# Altium PCB DUTBoard_Sandbox.PcbDoc (part 3 of 6)
Units mil, origin at the board's own origin, x right, y up, seen from the top; angles counter-clockwise.
Board outline 5475 x 5475 mil, 4 copper layers (Top Layer, Mid-Layer 1, Mid-Layer 2, Bottom Layer); 89 components, 507 nets, 1705 pads, 1204 vias.
Unrouted connection lines stored in the file: 6.
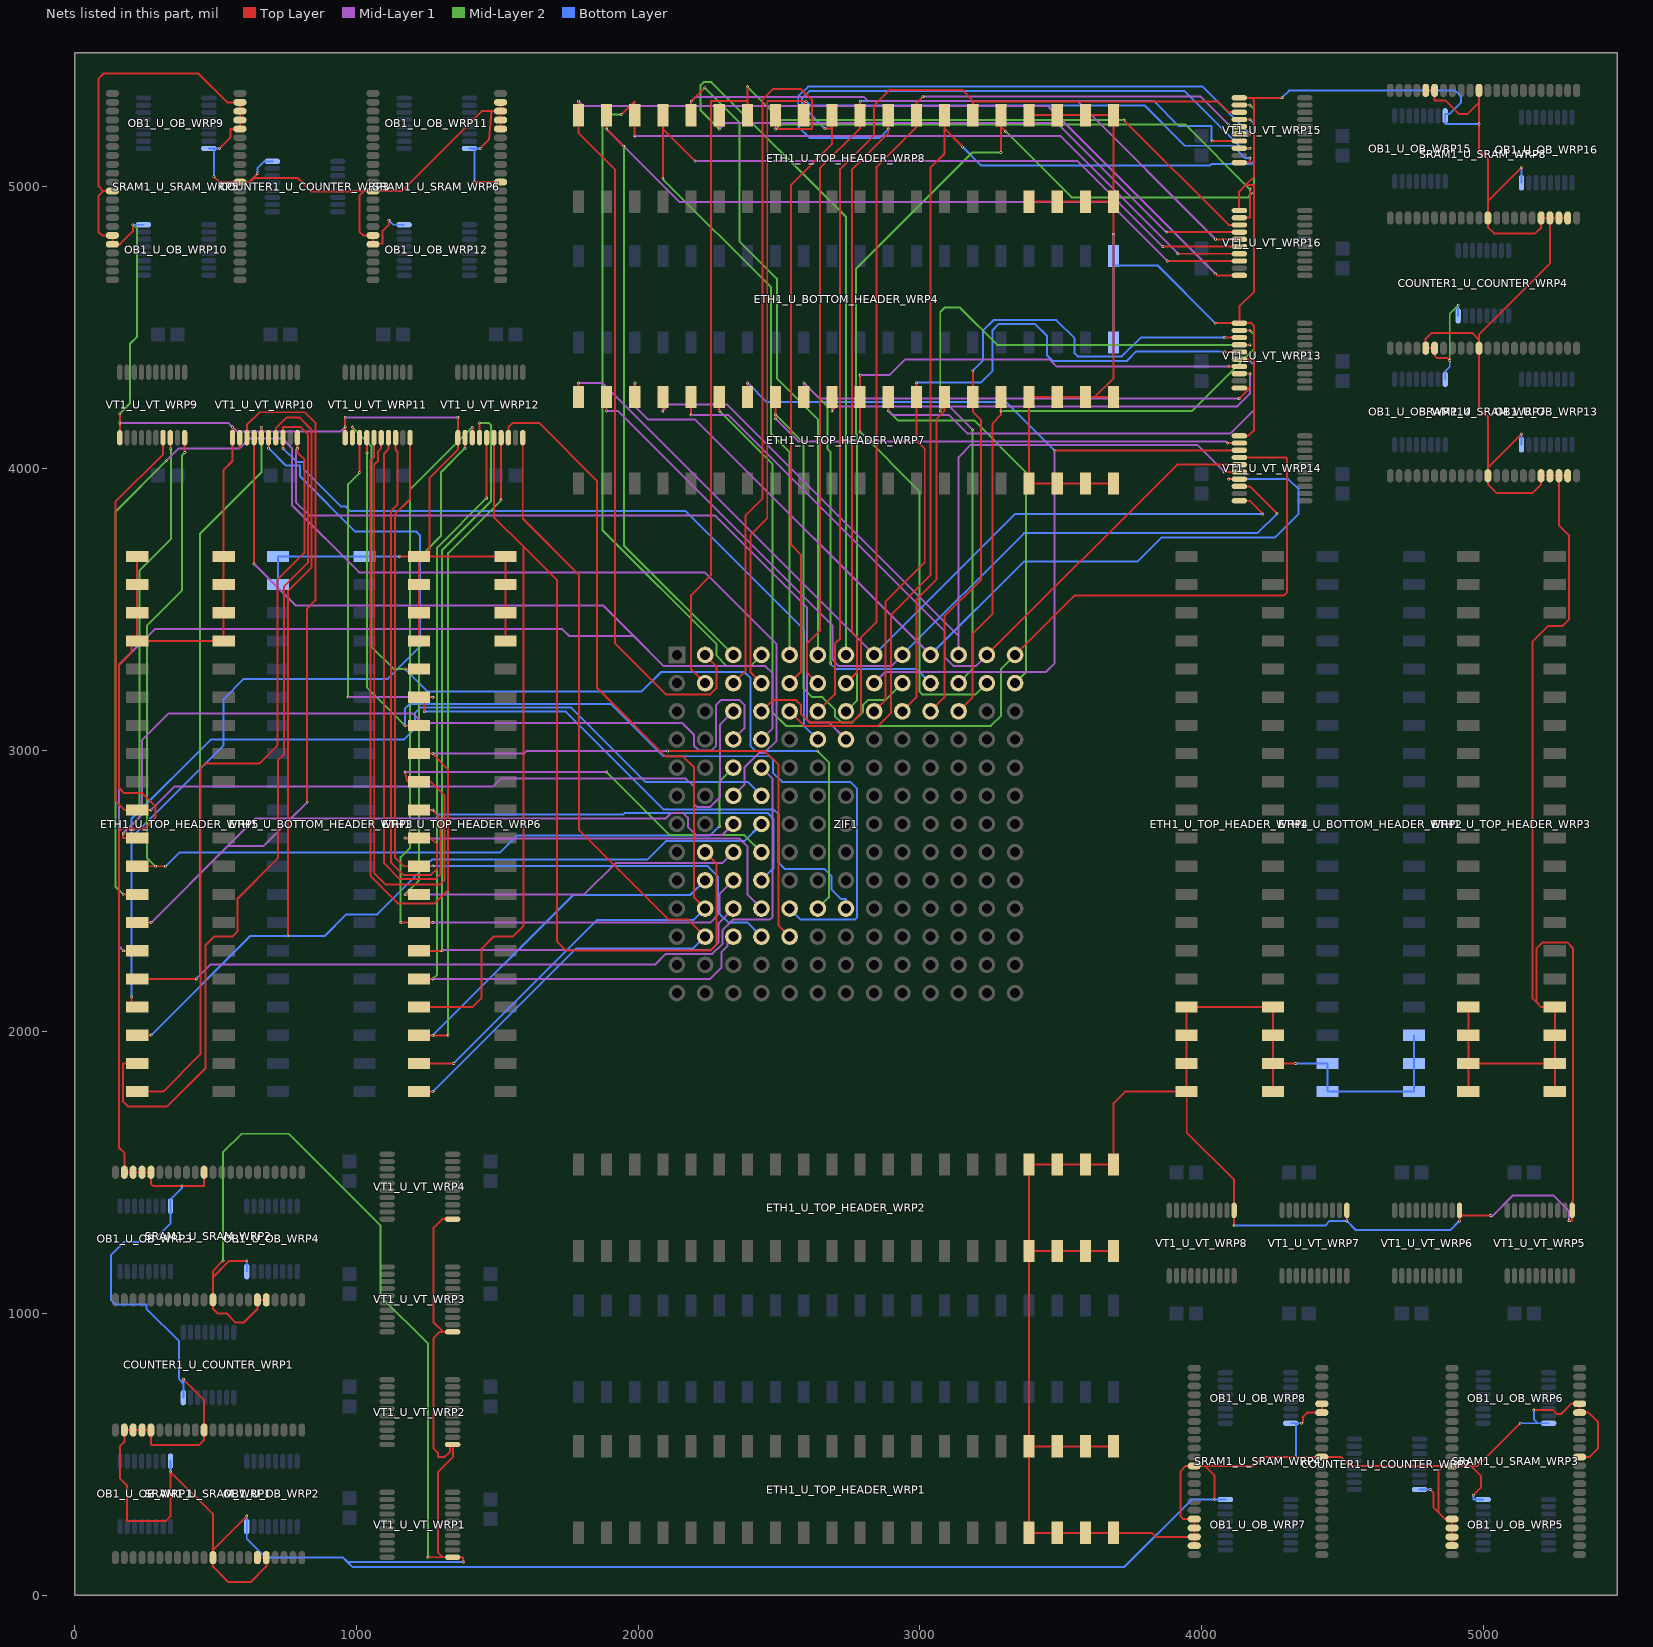
[diagram p5: the nets of this part, all layers, seen from the top]

## Via types
v1: diameter 10, hole 5, Top Layer to Bottom Layer, 1204 vias

## Nets (pads, with @x,y where several pads share a name; then routed paths per layer and width w, separated by ;. In a path a pad name is that pad's centre, name@x,y a point inside that pad or via, vN(x,y) a via of type N, cw(c..) or ccw(c..) an arc to the next point about the centre after c; other vN are vias at no path point) (continued)
GND: COUNTER1_U_COUNTER_WRP1.GND COUNTER1_U_COUNTER_WRP2.GND COUNTER1_U_COUNTER_WRP3.GND COUNTER1_U_COUNTER_WRP4.GND ETH1_U_BOTTOM_HEADER_WRP2.18 ETH1_U_BOTTOM_HEADER_WRP2.19 ETH1_U_BOTTOM_HEADER_WRP2.20 ETH1_U_BOTTOM_HEADER_WRP2.21 ETH1_U_BOTTOM_HEADER_WRP2.22 ETH1_U_BOTTOM_HEADER_WRP3.19 ETH1_U_BOTTOM_HEADER_WRP3.20 ETH1_U_BOTTOM_HEADER_WRP3.21 ETH1_U_BOTTOM_HEADER_WRP4.20 ETH1_U_BOTTOM_HEADER_WRP4.21 ETH1_U_TOP_HEADER_WRP1.17 ETH1_U_TOP_HEADER_WRP1.18 ETH1_U_TOP_HEADER_WRP1.19 ETH1_U_TOP_HEADER_WRP1.20 ETH1_U_TOP_HEADER_WRP1.21 ETH1_U_TOP_HEADER_WRP1.22 ETH1_U_TOP_HEADER_WRP1.23 ETH1_U_TOP_HEADER_WRP1.24 ETH1_U_TOP_HEADER_WRP2.17 ETH1_U_TOP_HEADER_WRP2.18 ETH1_U_TOP_HEADER_WRP2.19 ETH1_U_TOP_HEADER_WRP2.20 ETH1_U_TOP_HEADER_WRP2.21 ETH1_U_TOP_HEADER_WRP2.22 ETH1_U_TOP_HEADER_WRP2.23 ETH1_U_TOP_HEADER_WRP2.24 ETH1_U_TOP_HEADER_WRP3.17 ETH1_U_TOP_HEADER_WRP3.18 ETH1_U_TOP_HEADER_WRP3.19 ETH1_U_TOP_HEADER_WRP3.20 ETH1_U_TOP_HEADER_WRP3.21 ETH1_U_TOP_HEADER_WRP3.22 ETH1_U_TOP_HEADER_WRP3.23 ETH1_U_TOP_HEADER_WRP3.24 ETH1_U_TOP_HEADER_WRP4.17 ETH1_U_TOP_HEADER_WRP4.18 ETH1_U_TOP_HEADER_WRP4.19 ETH1_U_TOP_HEADER_WRP4.20 ETH1_U_TOP_HEADER_WRP4.21 ETH1_U_TOP_HEADER_WRP4.22 ETH1_U_TOP_HEADER_WRP4.23 ETH1_U_TOP_HEADER_WRP4.24 ETH1_U_TOP_HEADER_WRP5.17 ETH1_U_TOP_HEADER_WRP5.18 ETH1_U_TOP_HEADER_WRP5.19 ETH1_U_TOP_HEADER_WRP5.20 ETH1_U_TOP_HEADER_WRP5.21 ETH1_U_TOP_HEADER_WRP5.22 ETH1_U_TOP_HEADER_WRP5.23 ETH1_U_TOP_HEADER_WRP5.24 ETH1_U_TOP_HEADER_WRP6.17 ETH1_U_TOP_HEADER_WRP6.18 ETH1_U_TOP_HEADER_WRP6.19 ETH1_U_TOP_HEADER_WRP6.20 ETH1_U_TOP_HEADER_WRP6.21 ETH1_U_TOP_HEADER_WRP6.22 ETH1_U_TOP_HEADER_WRP6.23 ETH1_U_TOP_HEADER_WRP6.24 ETH1_U_TOP_HEADER_WRP7.17 ETH1_U_TOP_HEADER_WRP7.18 ETH1_U_TOP_HEADER_WRP7.19 ETH1_U_TOP_HEADER_WRP7.20 ETH1_U_TOP_HEADER_WRP7.21 ETH1_U_TOP_HEADER_WRP7.22 ETH1_U_TOP_HEADER_WRP7.23 ETH1_U_TOP_HEADER_WRP7.24 ETH1_U_TOP_HEADER_WRP8.17 ETH1_U_TOP_HEADER_WRP8.18 ETH1_U_TOP_HEADER_WRP8.19 ETH1_U_TOP_HEADER_WRP8.20 ETH1_U_TOP_HEADER_WRP8.21 ETH1_U_TOP_HEADER_WRP8.22 ETH1_U_TOP_HEADER_WRP8.23 ETH1_U_TOP_HEADER_WRP8.24 OB1_U_OB_WRP1.GND OB1_U_OB_WRP2.GND OB1_U_OB_WRP3.GND OB1_U_OB_WRP4.GND OB1_U_OB_WRP5.GND OB1_U_OB_WRP6.GND OB1_U_OB_WRP7.GND OB1_U_OB_WRP8.GND OB1_U_OB_WRP9.GND OB1_U_OB_WRP10.GND OB1_U_OB_WRP11.GND OB1_U_OB_WRP12.GND OB1_U_OB_WRP13.GND OB1_U_OB_WRP14.GND OB1_U_OB_WRP15.GND OB1_U_OB_WRP16.GND SRAM1_U_SRAM_WRP1.ADDR12 SRAM1_U_SRAM_WRP1.ADDR13 SRAM1_U_SRAM_WRP1.ADDR14 SRAM1_U_SRAM_WRP1.ADDR15 SRAM1_U_SRAM_WRP1.VSS SRAM1_U_SRAM_WRP1.~BHE SRAM1_U_SRAM_WRP1.~BLE SRAM1_U_SRAM_WRP2.ADDR12 SRAM1_U_SRAM_WRP2.ADDR13 SRAM1_U_SRAM_WRP2.ADDR14 SRAM1_U_SRAM_WRP2.ADDR15 SRAM1_U_SRAM_WRP2.VSS SRAM1_U_SRAM_WRP2.~BHE SRAM1_U_SRAM_WRP2.~BLE SRAM1_U_SRAM_WRP3.ADDR12 SRAM1_U_SRAM_WRP3.ADDR13 SRAM1_U_SRAM_WRP3.ADDR14 SRAM1_U_SRAM_WRP3.ADDR15 SRAM1_U_SRAM_WRP3.VSS SRAM1_U_SRAM_WRP3.~BHE SRAM1_U_SRAM_WRP3.~BLE SRAM1_U_SRAM_WRP4.ADDR12 SRAM1_U_SRAM_WRP4.ADDR13 SRAM1_U_SRAM_WRP4.ADDR14 SRAM1_U_SRAM_WRP4.ADDR15 SRAM1_U_SRAM_WRP4.VSS SRAM1_U_SRAM_WRP4.~BHE SRAM1_U_SRAM_WRP4.~BLE SRAM1_U_SRAM_WRP5.ADDR12 SRAM1_U_SRAM_WRP5.ADDR13 SRAM1_U_SRAM_WRP5.ADDR14 SRAM1_U_SRAM_WRP5.ADDR15 SRAM1_U_SRAM_WRP5.VSS SRAM1_U_SRAM_WRP5.~BHE SRAM1_U_SRAM_WRP5.~BLE SRAM1_U_SRAM_WRP6.ADDR12 SRAM1_U_SRAM_WRP6.ADDR13 SRAM1_U_SRAM_WRP6.ADDR14 SRAM1_U_SRAM_WRP6.ADDR15 SRAM1_U_SRAM_WRP6.VSS SRAM1_U_SRAM_WRP6.~BHE SRAM1_U_SRAM_WRP6.~BLE SRAM1_U_SRAM_WRP7.ADDR12 SRAM1_U_SRAM_WRP7.ADDR13 SRAM1_U_SRAM_WRP7.ADDR14 SRAM1_U_SRAM_WRP7.ADDR15 SRAM1_U_SRAM_WRP7.VSS SRAM1_U_SRAM_WRP7.~BHE SRAM1_U_SRAM_WRP7.~BLE SRAM1_U_SRAM_WRP8.ADDR12 SRAM1_U_SRAM_WRP8.ADDR13 SRAM1_U_SRAM_WRP8.ADDR14 SRAM1_U_SRAM_WRP8.ADDR15 SRAM1_U_SRAM_WRP8.VSS SRAM1_U_SRAM_WRP8.~BHE SRAM1_U_SRAM_WRP8.~BLE VT1_U_VT_WRP1.GND VT1_U_VT_WRP2.GND VT1_U_VT_WRP3.GND VT1_U_VT_WRP4.GND VT1_U_VT_WRP5.GND VT1_U_VT_WRP6.GND VT1_U_VT_WRP7.GND VT1_U_VT_WRP8.GND VT1_U_VT_WRP9.GND VT1_U_VT_WRP10.GND VT1_U_VT_WRP11.GND VT1_U_VT_WRP12.GND VT1_U_VT_WRP13.GND VT1_U_VT_WRP14.GND VT1_U_VT_WRP15.GND VT1_U_VT_WRP16.GND | length 47961.1
  Top Layer w7: SRAM1_U_SRAM_WRP5.VSS@133.62,4984.25 101.25,4984.25 ; VT1_U_VT_WRP9.GND@159.84,4108.86 v1(159.84,4161) v1(159.84,4194) ; v1(206,4864.57) 206,4841.28 160,4795.28 SRAM1_U_SRAM_WRP5.~BHE@133.62,4795.28 SRAM1_U_SRAM_WRP5.~BLE@133.62,4826.77 96,4826.77 85,4837.77 85,4968 101.25,4984.25 ; ETH1_U_TOP_HEADER_WRP5.21@221.46,3687.5 ETH1_U_TOP_HEADER_WRP5.22@221.46,3587.5 ETH1_U_TOP_HEADER_WRP5.23@221.46,3487.5 ETH1_U_TOP_HEADER_WRP5.24@221.46,3387.5 ; v1(385.43,766.5) 459.25,692.68 SRAM1_U_SRAM_WRP1.VSS@459.25,586.38 459.25,552 440.25,533 273.74,533 270.28,536.47 SRAM1_U_SRAM_WRP1.ADDR15@270.28,586.38 SRAM1_U_SRAM_WRP1.ADDR14@238.78,586.38 SRAM1_U_SRAM_WRP1.ADDR13@207.28,586.38 SRAM1_U_SRAM_WRP1.ADDR12@175.79,586.38 175.79,543.99 160,528.2 160,416 185,391 185,264 186.29,262.71 322.28,262.71 339.57,280 v1(339.57,439) 490.75,287.82 490.75,161.31 ; SRAM1_U_SRAM_WRP2.VSS@459.25,1501.38 459.25,1454.01 458.38,1453.14 v1(379.87,1453.14) 277.56,1453.14 270.28,1460.42 SRAM1_U_SRAM_WRP2.ADDR15@270.28,1501.38 SRAM1_U_SRAM_WRP2.ADDR14@238.78,1501.38 SRAM1_U_SRAM_WRP2.ADDR13@207.28,1501.38 SRAM1_U_SRAM_WRP2.ADDR12@175.79,1501.38 175.79,1570 157,1588.79 157,2712 166.13,2721.13 247.13,2721.13 286,2760 286,2801 240,2847 176,2847 157,2866 157,3302 202,3347 202,3387.5 ETH1_U_TOP_HEADER_WRP5.24@221.46,3387.5 ; v1(494,5035.75) 514,5015.75 SRAM1_U_SRAM_WRP5.VSS@586.38,5015.75 618.25,5015.75 ; v1(514,5135.43) 553,5174.43 553,5204.72 SRAM1_U_SRAM_WRP5.ADDR15@586.38,5204.72 SRAM1_U_SRAM_WRP5.ADDR14@586.38,5236.22 SRAM1_U_SRAM_WRP5.ADDR13@586.38,5267.72 SRAM1_U_SRAM_WRP5.ADDR12@586.38,5299.21 541,5299.21 439.21,5401 102,5401 85,5384 85,5000.5 101.25,4984.25 ; v1(526,1187) 490.75,1151.75 490.75,1129.63 ; v1(559.84,4146.42) VT1_U_VT_WRP10.GND@559.84,4108.86 559.84,4026 528,3994.16 528,3687.5 ETH1_U_TOP_HEADER_WRP5.20@528.54,3687.5 ETH1_U_TOP_HEADER_WRP5.19@528.54,3587.5 ETH1_U_TOP_HEADER_WRP5.18@528.54,3487.5 ETH1_U_TOP_HEADER_WRP5.17@528.54,3387.5 ETH1_U_TOP_HEADER_WRP5.24@221.46,3387.5 ; v1(610.43,281) 490.75,161.31 ; v1(610.43,1187) 548.12,1187 490.75,1129.63 ; SRAM1_U_SRAM_WRP1.~BLE@648.23,133.62 SRAM1_U_SRAM_WRP1.~BHE@679.72,133.62 679.72,102.72 624,47 544.75,47 490.75,101 SRAM1_U_SRAM_WRP1.VSS@490.75,133.62 490.75,161.31 ; v1(649,5046.5) 618.25,5015.75 ; SRAM1_U_SRAM_WRP2.~BHE@679.72,1048.62 SRAM1_U_SRAM_WRP2.~BLE@648.23,1048.62 648.23,1016 600.73,968.5 570.23,968.5 538.73,1000 506.75,1000 490.75,1016 SRAM1_U_SRAM_WRP2.VSS@490.75,1048.62 490.75,1129.63 ; VT1_U_VT_WRP11.GND@959.84,4108.86 v1(959.84,4147) 959.84,4180.84 v1(960,4181) ; v1(1115,4880.57) 1115,4864.57 1091.5,4841.07 1091.5,4798.78 SRAM1_U_SRAM_WRP6.~BHE@1058.62,4795.28 SRAM1_U_SRAM_WRP6.~BLE@1058.62,4826.77 1023.23,4826.77 1010,4840 1010,4968 1026.25,4984.25 ; v1(1153,3687.5) ETH1_U_TOP_HEADER_WRP6.21@1221.46,3687.5 ; ETH1_U_TOP_HEADER_WRP6.24@1221.46,3387.5 ETH1_U_TOP_HEADER_WRP6.23@1221.46,3487.5 ETH1_U_TOP_HEADER_WRP6.22@1221.46,3587.5 ETH1_U_TOP_HEADER_WRP6.21@1221.46,3687.5 ; v1(1254,134.84) 1306.16,134.84 ; VT1_U_VT_WRP3.GND@1341.14,934.84 1307.16,934.84 ; VT1_U_VT_WRP4.GND@1341.14,1334.84 1304,1334.84 1274,1304.84 1274,968 1307.16,934.84 ; v1(1359.84,4181) VT1_U_VT_WRP12.GND@1359.84,4108.86 1359.84,4066 1259,3965.16 ETH1_U_TOP_HEADER_WRP6.21@1259,3687.5 ; v1(1379,118) 1378.7,134.84 VT1_U_VT_WRP1.GND@1341.14,134.84 1306.16,134.84 ; v1(1419,5015.75) SRAM1_U_SRAM_WRP6.VSS@1511.38,5015.75 ; v1(1439,5135.43) 1470.14,5166.58 1479,5267.72 ; SRAM1_U_SRAM_WRP6.ADDR15@1511.38,5204.72 SRAM1_U_SRAM_WRP6.ADDR14@1511.38,5236.22 SRAM1_U_SRAM_WRP6.ADDR13@1511.38,5267.72 ; SRAM1_U_SRAM_WRP6.ADDR12@1511.38,5299.21 SRAM1_U_SRAM_WRP6.ADDR13@1511.38,5267.72 ; ETH1_U_TOP_HEADER_WRP6.17@1528.54,3387.5 ETH1_U_TOP_HEADER_WRP6.18@1528.54,3487.5 ETH1_U_TOP_HEADER_WRP6.19@1528.54,3587.5 ETH1_U_TOP_HEADER_WRP6.20@1528.54,3687.5 ETH1_U_TOP_HEADER_WRP6.21@1259,3687.5 ; ETH1_U_TOP_HEADER_WRP8.17@3387.5,4946.46 ETH1_U_TOP_HEADER_WRP8.18@3487.5,4946.46 ETH1_U_TOP_HEADER_WRP8.19@3587.5,4946.46 ETH1_U_TOP_HEADER_WRP8.20@3687.5,4946.46 ; ETH1_U_TOP_HEADER_WRP8.24@3387.5,5253.54 ETH1_U_TOP_HEADER_WRP8.23@3487.5,5253.54 ETH1_U_TOP_HEADER_WRP8.22@3587.5,5253.54 ETH1_U_TOP_HEADER_WRP8.21@3687.5,5253.54 ETH1_U_TOP_HEADER_WRP8.20@3687.5,4946.46 ; ETH1_U_TOP_HEADER_WRP1.21@3687.5,528.54 ETH1_U_TOP_HEADER_WRP1.22@3587.5,528.54 ETH1_U_TOP_HEADER_WRP1.23@3487.5,528.54 ETH1_U_TOP_HEADER_WRP1.24@3387.5,528.54 ; ETH1_U_TOP_HEADER_WRP2.20@3687.5,1221.46 ETH1_U_TOP_HEADER_WRP2.19@3587.5,1221.46 ETH1_U_TOP_HEADER_WRP2.18@3487.5,1221.46 ETH1_U_TOP_HEADER_WRP2.17@3387.5,1221.46 ; ETH1_U_TOP_HEADER_WRP7.20@3687.5,3946.46 ETH1_U_TOP_HEADER_WRP7.19@3587.5,3946.46 ETH1_U_TOP_HEADER_WRP7.18@3487.5,3946.46 ETH1_U_TOP_HEADER_WRP7.17@3387.5,3946.46 ETH1_U_TOP_HEADER_WRP7.24@3387.5,4253.54 ETH1_U_TOP_HEADER_WRP7.23@3487.5,4253.54 ETH1_U_TOP_HEADER_WRP7.22@3587.5,4253.54 3620.54,4253.54 ; ETH1_U_TOP_HEADER_WRP7.21@3687.5,4253.54 3620.54,4253.54 ; SRAM1_U_SRAM_WRP4.ADDR12@3973.62,175.79 SRAM1_U_SRAM_WRP4.ADDR13@3973.62,207.28 ; v1(4046,339.57) 4046,424 4010.75,459.25 ; v1(4048,4515.16) VT1_U_VT_WRP13.GND@4133.86,4515.16 ; v1(4115.16,1312) VT1_U_VT_WRP8.GND@4115.16,1366.14 4115.16,1474 3947,1642.16 3947,1787.5 ETH1_U_TOP_HEADER_WRP4.20@3946.46,1787.5 ; VT1_U_VT_WRP14.GND@4133.86,4115.16 4165.16,4115.16 4186,4136 4186,4505.16 4176,4515.16 VT1_U_VT_WRP13.GND@4133.86,4515.16 ; VT1_U_VT_WRP16.GND@4133.86,4915.16 4133,4915.16 4133,4982 4157,5006 ; VT1_U_VT_WRP15.GND@4133.86,5315.16 4176,5315.16 ; ETH1_U_TOP_HEADER_WRP4.21@4253.54,1787.5 ETH1_U_TOP_HEADER_WRP4.22@4253.54,1887.5 ; v1(4284.84,5315.16) 4176,5315.16 ; v1(4334,1887.5) ETH1_U_TOP_HEADER_WRP4.22@4253.54,1887.5 ; v1(4354,610.43) 4359.88,616.31 4359.88,633.61 4374.49,648.23 SRAM1_U_SRAM_WRP4.~BLE@4426.38,648.23 SRAM1_U_SRAM_WRP4.~BHE@4426.38,679.72 ; v1(4515.16,1328.58) VT1_U_VT_WRP7.GND@4515.16,1366.14 ; SRAM1_U_SRAM_WRP8.~BHE@4795.28,5341.38 SRAM1_U_SRAM_WRP8.~BLE@4826.77,5341.38 4826.77,5306 4865,5306 4913,5258 4944,5258 4984.25,5298.25 ; v1(4811.2,375.43) 4822.6,364.03 4822.6,311.67 4840,294.28 ; v1(4880.5,4382.7) 4871.2,4392 4834.77,4392 4826.77,4400 SRAM1_U_SRAM_WRP7.~BLE@4826.77,4426.38 SRAM1_U_SRAM_WRP7.~BHE@4795.28,4426.38 4795.28,4460.28 4816,4481 4960,4481 4984.25,4456.75 ; SRAM1_U_SRAM_WRP3.ADDR12@4888.62,175.79 SRAM1_U_SRAM_WRP3.ADDR13@4888.62,207.28 SRAM1_U_SRAM_WRP3.ADDR14@4888.62,238.78 SRAM1_U_SRAM_WRP3.ADDR15@4888.62,270.28 4864,270.28 4840,294.28 ; v1(4915.16,1328.58) VT1_U_VT_WRP6.GND@4915.16,1348 ; VT1_U_VT_WRP6.GND@4915.16,1366.14 VT1_U_VT_WRP6.GND@4915.16,1348 ; ETH1_U_TOP_HEADER_WRP3.20@4946.46,1787.5 ETH1_U_TOP_HEADER_WRP3.19@4946.46,1887.5 ; ETH1_U_TOP_HEADER_WRP3.17@4946.46,2087.5 ETH1_U_TOP_HEADER_WRP3.18@4946.46,1987.5 ETH1_U_TOP_HEADER_WRP3.19@4946.46,1887.5 ; v1(4964,355) 4991,382 4991,424 4955.75,459.25 ; SRAM1_U_SRAM_WRP8.VSS@4984.25,5341.38 4984.25,5298.25 ; v1(5026,1348) VT1_U_VT_WRP6.GND@4915.16,1348 ; v1(5131,610.43) 4979.82,459.25 4955.75,459.25 ; v1(5135.43,4122) 5015.75,4002.31 ; v1(5135.43,5068) 5015.75,4948.31 ; v1(5179,657) 5247.28,657 5261.06,643.22 5275.49,643.22 5312,679.72 SRAM1_U_SRAM_WRP3.~BHE@5341.38,679.72 SRAM1_U_SRAM_WRP3.~BLE@5341.38,648.23 5373.77,648.23 5406,616 5406,520 5376.75,490.75 SRAM1_U_SRAM_WRP3.VSS@5341.38,490.75 ; ETH1_U_TOP_HEADER_WRP3.21@5253.54,1787.5 ETH1_U_TOP_HEADER_WRP3.22@5253.54,1887.5 ; SRAM1_U_SRAM_WRP7.ADDR12@5299.21,3973.62 SRAM1_U_SRAM_WRP7.ADDR13@5267.72,3973.62 ; SRAM1_U_SRAM_WRP8.ADDR12@5299.21,4888.62 SRAM1_U_SRAM_WRP8.ADDR13@5267.72,4888.62 SRAM1_U_SRAM_WRP8.ADDR14@5236.22,4888.62 ; v1(5304,1329) 5315.16,1329 VT1_U_VT_WRP5.GND@5315.16,1366.14 5315.16,1397.16 5318,1400 5318,2296 5297,2317 5210,2317 5189,2296 5189,2104 ; 618.25,5015.75 621.5,5015.75 636.25,5030.5 791.25,5030.5 839.45,4982.3 985.7,4982.3 987.66,4984.25 1026.25,4984.25 ; 1026.25,4984.25 SRAM1_U_SRAM_WRP6.VSS@1058.62,4984.25 1161.25,4984.25 1444.72,5267.72 1479,5267.72 ; ETH1_U_TOP_HEADER_WRP6.21@1221.46,3687.5 ETH1_U_TOP_HEADER_WRP6.21@1259,3687.5 ; 1306.16,134.84 1289,152 1289,437 1342,490 1342,534.84 VT1_U_VT_WRP2.GND@1341.14,534.84 1332,534.84 1332,510 1312,490 1289,490 1289,506 1273,522 1273,911.84 1296,934.84 1307.16,934.84 ; 1479,5267.72 SRAM1_U_SRAM_WRP6.ADDR13@1511.38,5267.72 ; ETH1_U_TOP_HEADER_WRP1.24@3387.5,528.54 ETH1_U_TOP_HEADER_WRP2.17@3387.5,1221.46 ; ETH1_U_TOP_HEADER_WRP1.24@3387.5,528.54 ETH1_U_TOP_HEADER_WRP1.17@3387.5,221.46 ETH1_U_TOP_HEADER_WRP1.18@3487.5,221.46 ETH1_U_TOP_HEADER_WRP1.19@3587.5,221.46 ETH1_U_TOP_HEADER_WRP1.20@3687.5,221.46 3823,221.46 3837.17,207.28 SRAM1_U_SRAM_WRP4.ADDR13@3973.62,207.28 ; ETH1_U_TOP_HEADER_WRP2.17@3387.5,1221.46 ETH1_U_TOP_HEADER_WRP2.24@3387.5,1528.54 ETH1_U_TOP_HEADER_WRP2.23@3487.5,1528.54 ETH1_U_TOP_HEADER_WRP2.22@3587.5,1528.54 ETH1_U_TOP_HEADER_WRP2.21@3687.5,1528.54 3687.5,1747 3728,1787.5 ETH1_U_TOP_HEADER_WRP4.20@3946.46,1787.5 ; 3620.54,4253.54 3687.5,4320.5 v1(3687.5,4831) ETH1_U_TOP_HEADER_WRP8.20@3687.5,4946.46 ; ETH1_U_TOP_HEADER_WRP4.20@3946.46,1787.5 ETH1_U_TOP_HEADER_WRP4.19@3946.46,1887.5 ETH1_U_TOP_HEADER_WRP4.18@3946.46,1987.5 ETH1_U_TOP_HEADER_WRP4.17@3946.46,2087.5 ETH1_U_TOP_HEADER_WRP4.24@4253.54,2087.5 ETH1_U_TOP_HEADER_WRP4.23@4253.54,1987.5 ETH1_U_TOP_HEADER_WRP4.22@4253.54,1887.5 ; SRAM1_U_SRAM_WRP4.ADDR13@3973.62,207.28 SRAM1_U_SRAM_WRP4.ADDR14@3973.62,238.78 SRAM1_U_SRAM_WRP4.ADDR15@3973.62,270.28 3934.72,270.28 3925,280 3925,440 3944.25,459.25 SRAM1_U_SRAM_WRP4.VSS@3973.62,459.25 4010.75,459.25 ; 4010.75,459.25 4184,459.25 4215.5,490.75 v1(4334,490.75) SRAM1_U_SRAM_WRP4.VSS@4426.38,490.75 4494.26,490.75 4525.75,459.25 4859.25,459.25 ; VT1_U_VT_WRP13.GND@4133.86,4515.16 4133.86,4574.86 4186,4627 4186,5006 4157,5006 ; 4157,5006 4186,5035 4186,5305.16 4176,5315.16 ; 4840,294.28 4840,440 4859.25,459.25 ; 4859.25,459.25 SRAM1_U_SRAM_WRP3.VSS@4888.62,459.25 4955.75,459.25 ; ETH1_U_TOP_HEADER_WRP3.19@4946.46,1887.5 ETH1_U_TOP_HEADER_WRP3.22@5253.54,1887.5 ; 4984.25,4456.75 4984.25,4474.25 5236.22,4726.22 SRAM1_U_SRAM_WRP8.ADDR14@5236.22,4888.62 ; 4984.25,4456.75 SRAM1_U_SRAM_WRP7.VSS@4984.25,4426.38 4984.25,4215.5 5015.75,4184 5015.75,4002.31 ; 4984.25,5298.25 v1(4984.25,5222) 4984.25,5130.5 5015.75,5099 5015.75,4948.31 ; 5015.75,4002.31 SRAM1_U_SRAM_WRP7.VSS@5015.75,3973.62 5015.75,3944 5047.75,3912 5172.72,3912 5204.72,3944 SRAM1_U_SRAM_WRP7.ADDR15@5204.72,3973.62 SRAM1_U_SRAM_WRP7.ADDR14@5236.22,3973.62 SRAM1_U_SRAM_WRP7.ADDR13@5267.72,3973.62 ; 5015.75,4948.31 SRAM1_U_SRAM_WRP8.VSS@5015.75,4888.62 5015.75,4856 5037.75,4834 5184,4834 5204.72,4854.72 SRAM1_U_SRAM_WRP8.ADDR15@5204.72,4888.62 SRAM1_U_SRAM_WRP8.ADDR14@5236.22,4888.62 ; 5189,2104 5173.67,2119.33 5173.67,3384.67 5229,3440 5280,3440 5303,3463 5303,3762.72 5267.72,3798 SRAM1_U_SRAM_WRP7.ADDR13@5267.72,3973.62 ; 5189,2104 5205.5,2087.5 ETH1_U_TOP_HEADER_WRP3.24@5253.54,2087.5 ETH1_U_TOP_HEADER_WRP3.23@5253.54,1987.5 ETH1_U_TOP_HEADER_WRP3.22@5253.54,1887.5
  Mid-Layer 1 w7: v1(159.84,4161) 545.26,4161 v1(559.84,4146.42) 574.84,4131 943.84,4131 v1(959.84,4147) ; v1(960,4181) v1(1359.84,4181) ; v1(5026,1348) 5030,1344 5105,1419 5248,1419 5304,1363 v1(5304,1329)
  Mid-Layer 2 w7: v1(159.84,4194) 196,4230.16 196,4442 221,4467 221,4849.57 v1(206,4864.57) ; v1(526,1187) 526,1572 592,1638 759,1638 1086,1311 1086,1060 1254,892 v1(1254,134.84) ; v1(4880.5,4382.7) 4880.5,4549.07 v1(4910.43,4579)
  Bottom Layer w7: v1(206,4864.57) OB1_U_OB_WRP10.GND@243.86,4864.57 ; v1(339.57,439) OB1_U_OB_WRP1.GND@339.57,476.14 ; v1(379.87,1453.14) 379.87,1444.8 339.57,1404.5 OB1_U_OB_WRP3.GND@339.57,1381.14 339.57,1318.95 274.61,1254 176,1254 128,1206 128,1049 145.52,1031.48 255.26,1031.48 255.26,1015.74 370.19,900.81 370.19,766.81 385.43,751.57 ; COUNTER1_U_COUNTER_WRP1.GND@385.43,701.36 385.43,751.57 ; v1(385.43,766.5) 385.43,751.57 ; OB1_U_OB_WRP9.GND@476.14,5135.43 OB1_U_OB_WRP9.GND@494,5135.43 ; v1(494,5035.75) OB1_U_OB_WRP9.GND@494,5135.43 ; v1(514,5135.43) OB1_U_OB_WRP9.GND@494,5135.43 ; v1(610.43,281) OB1_U_OB_WRP2.GND@610.43,243.86 610.43,200.2 676.63,134 952,134 968,118 ; OB1_U_OB_WRP4.GND@610.43,1148.86 v1(610.43,1187) ; v1(649,5046.5) 649,5066.57 672,5089.57 COUNTER1_U_COUNTER_WRP3.GND@701.36,5089.57 ; ETH1_U_BOTTOM_HEADER_WRP3.19@721.46,3587.5 ETH1_U_BOTTOM_HEADER_WRP3.20@721.46,3687.5 ETH1_U_BOTTOM_HEADER_WRP3.21@1028.54,3687.5 v1(1153,3687.5) ; v1(1115,4880.57) 1131,4864.57 OB1_U_OB_WRP12.GND@1168.86,4864.57 ; v1(1379,118) 968,118 ; OB1_U_OB_WRP11.GND@1401.14,5135.43 OB1_U_OB_WRP11.GND@1419,5135.43 ; v1(1419,5015.75) OB1_U_OB_WRP11.GND@1419,5135.43 ; v1(1439,5135.43) OB1_U_OB_WRP11.GND@1419,5135.43 ; ETH1_U_BOTTOM_HEADER_WRP4.21@3687.5,4446.46 ETH1_U_BOTTOM_HEADER_WRP4.20@3687.5,4720 ; v1(3687.5,4831) ETH1_U_BOTTOM_HEADER_WRP4.20@3687.5,4753.54 ETH1_U_BOTTOM_HEADER_WRP4.20@3687.5,4720 ; v1(4048,4515.16) 3843.16,4720 ETH1_U_BOTTOM_HEADER_WRP4.20@3687.5,4720 ; OB1_U_OB_WRP7.GND@4083.86,339.57 v1(4046,339.57) 3964.57,339.57 3726,101 985,101 968,118 ; v1(4115.16,1312) 4438,1312 4454.58,1328.58 v1(4515.16,1328.58) 4547.74,1296 4882.57,1296 v1(4915.16,1328.58) ; v1(4284.84,5315.16) 4310.68,5341 4900,5341 4921,5320 4921,5299 4880,5258 4864.57,5258 OB1_U_OB_WRP15.GND@4864.57,5251.14 4864.57,5222 v1(4984.25,5222) ; OB1_U_OB_WRP8.GND@4316.14,610.43 OB1_U_OB_WRP8.GND@4334,610.43 ; v1(4334,490.75) OB1_U_OB_WRP8.GND@4334,610.43 ; v1(4334,1887.5) ETH1_U_BOTTOM_HEADER_WRP2.22@4446.46,1887.5 ETH1_U_BOTTOM_HEADER_WRP2.21@4446.46,1787.5 ETH1_U_BOTTOM_HEADER_WRP2.20@4753.54,1787.5 ETH1_U_BOTTOM_HEADER_WRP2.19@4753.54,1887.5 ETH1_U_BOTTOM_HEADER_WRP2.18@4753.54,1987.5 ; v1(4354,610.43) OB1_U_OB_WRP8.GND@4334,610.43 ; COUNTER1_U_COUNTER_WRP2.GND@4773.64,375.43 v1(4811.2,375.43) ; OB1_U_OB_WRP14.GND@4864.57,4316.14 4864.57,4344 4880.5,4359.93 v1(4880.5,4382.7) ; COUNTER1_U_COUNTER_WRP4.GND@4910.43,4541.36 v1(4910.43,4579) ; v1(4964,355) 4964,339.57 OB1_U_OB_WRP5.GND@4998.86,339.57 ; v1(5131,610.43) 5193.57,610.43 ; OB1_U_OB_WRP13.GND@5135.43,4083.86 v1(5135.43,4122) ; OB1_U_OB_WRP16.GND@5135.43,5013.86 v1(5135.43,5068) ; v1(5179,657) 5179,625 5193.57,610.43 ; OB1_U_OB_WRP6.GND@5231.14,610.43 5193.57,610.43
INSIDE_B0: ETH1_U_TOP_HEADER_WRP8.40 VT1_U_VT_WRP16.IVCC0 ZIF1.1 | length 5158.3
  Top Layer w7: v1(1788,5303) 1787.5,5302.5 ETH1_U_TOP_HEADER_WRP8.40@1787.5,5253.54 1787.5,5190.5 1917,5061 1917,3379 2098,3198 2256,3198 2277,3219 2277,3298 ZIF1.1@2237.5,3337.5 ; v1(4049,4691) 4055.16,4684.84 VT1_U_VT_WRP16.IVCC0@4133.86,4684.84
  Mid-Layer 1 w7: v1(1788,5303) 1805,5286 3454,5286 v1(4049,4691)
INSIDE_B1: ETH1_U_TOP_HEADER_WRP8.39 VT1_U_VT_WRP16.IVCC1 ZIF1.2 | length 4542.1
  Top Layer w7: ETH1_U_TOP_HEADER_WRP8.39@1887.5,5253.54 1887.5,5204.5 v1(1888,5204) v1(1949,5143) ; v1(3877.98,4736.02) VT1_U_VT_WRP16.IVCC1@4133.86,4736.02
  Mid-Layer 1 w7: v1(1888,5204) v1(1949,5143) 2146,4946 3668,4946 v1(3877.98,4736.02)
  Mid-Layer 2 w7: v1(1949,5143) 1949,3726 ZIF1.2@2337.5,3337.5
INSIDE_B2: ETH1_U_TOP_HEADER_WRP8.38 VT1_U_VT_WRP16.IVCC2 ZIF1.3 | length 4837.1
  Top Layer w7: v1(1941,5256) 1987.5,5302.5 ETH1_U_TOP_HEADER_WRP8.38@1987.5,5253.54 v1(1987.5,5180) ; v1(3916.39,4761.61) VT1_U_VT_WRP16.IVCC2@4133.86,4761.61
  Mid-Layer 1 w7: v1(1987.5,5180) 3498,5180 v1(3916.39,4761.61)
  Mid-Layer 2 w7: v1(1941,5256) 1905,5256 1873,5224 1873,3781 2277,3377 2277,3336 2315,3298 2398,3298 ZIF1.3@2437.5,3337.5
INSIDE_B3: ETH1_U_TOP_HEADER_WRP8.37 VT1_U_VT_WRP16.IVCC3 ZIF1.4 | length 4321.6
  Top Layer w7: v1(2087.5,5026.5) 2087.5,5204.5 ; ETH1_U_TOP_HEADER_WRP8.37@2087.5,5253.54 2087.5,5204.5 ; v1(2201,5091) 2087.5,5204.5 ; v1(3861.88,4787.2) VT1_U_VT_WRP16.IVCC3@4133.86,4787.2
  Mid-Layer 1 w7: v1(2201,5091) 3558.08,5091 v1(3861.88,4787.2)
  Mid-Layer 2 w7: v1(2087.5,5026.5) 2472,4642 2472,4122 2537.5,4056.5 ZIF1.4@2537.5,3337.5
INSIDE_B4: ETH1_U_TOP_HEADER_WRP8.36 VT1_U_VT_WRP16.IVCC4 ZIF1.5 | length 4458.3
  Top Layer w7: ETH1_U_TOP_HEADER_WRP8.36@2187.5,5253.54 2187.5,5302.5 v1(2188,5303) v1(2236,5351) ; v1(4049,4812.8) VT1_U_VT_WRP16.IVCC4@4133.86,4812.8
  Mid-Layer 1 w7: v1(2188,5303) 2202.5,5317.5 2801.92,5317.5 2815.42,5304 3557.8,5304 v1(4049,4812.8)
  Mid-Layer 2 w7: v1(2236,5351) 2359,5228 2359,4806 2492,4673 2492,4319 2637.5,4173.5 ZIF1.5@2637.5,3337.5
INSIDE_B5: ETH1_U_TOP_HEADER_WRP8.35 VT1_U_VT_WRP16.IVCC5 ZIF1.6 | length 4522.7
  Top Layer w7: v1(2287.5,5204.17) ETH1_U_TOP_HEADER_WRP8.35@2287.5,5253.54 ; v1(3874.61,4838.39) VT1_U_VT_WRP16.IVCC5@4133.86,4838.39
  Mid-Layer 1 w7: v1(2287.5,5204.17) 2308.33,5225 3488,5225 v1(3874.61,4838.39)
  Mid-Layer 2 w7: v1(2287.5,5204.17) 2221,5270.67 2221,5360 2232,5371 2260,5371 2737.5,4893.5 ZIF1.6@2737.5,3337.5
INSIDE_B6: ETH1_U_TOP_HEADER_WRP8.34 VT1_U_VT_WRP16.IVCC6 ZIF1.7 | length 4295.7
  Top Layer w7: ZIF1.7@2237.5,3237.5 2188,3287 2188,3550 2258,3620 2258,5303 2387.5,5303 ; ETH1_U_TOP_HEADER_WRP8.34@2387.5,5253.54 2387.5,5303 ; v1(2387.5,5355) 2387.5,5303 ; v1(3724,5236) 4096.02,4863.98 VT1_U_VT_WRP16.IVCC6@4133.86,4863.98
  Mid-Layer 2 w7: v1(2387.5,5355) 2506.5,5236 v1(3724,5236)
INSIDE_B7: ETH1_U_TOP_HEADER_WRP8.33 VT1_U_VT_WRP16.IVCC7 ZIF1.8 | length 4527.6
  Top Layer w7: ZIF1.8@2337.5,3237.5 2380,3280 2380,3831 2441,3892 2441,5308 2480,5347 2576,5347 2617,5306 2617,5204 2488,5204.5 v1@2487.5,5204.5 ; ETH1_U_TOP_HEADER_WRP8.33@2487.5,5253.54 v1@2487.5,5204.5 ; v1(2488,5204) v1@2487.5,5204.5 ; VT1_U_VT_WRP16.IVCC7@4133.86,4889.57 4171,4889.57 v1(4171,4991)
  Mid-Layer 2 w7: v1(2488,5204) 2505,5221 3941,5221 v1(4171,4991)
INSIDE_B8: ETH1_U_TOP_HEADER_WRP8.32 VT1_U_VT_WRP15.IVCC0 ZIF1.9 | length 4009.2
  Top Layer w7: ZIF1.9@2437.5,3237.5 2398,3277 2398,3763 2458,3823 2458,5303 2587.5,5303 2587.5,5293.5 ; ETH1_U_TOP_HEADER_WRP8.32@2587.5,5253.54 2587.5,5293.5 ; v1(2596,5302) 2587.5,5293.5 ; VT1_U_VT_WRP15.IVCC0@4133.86,5084.84 4170.84,5084.84 4171,5085 v1(4171,5101)
  Bottom Layer w7: v1(2596,5302) 2610,5288 3797,5288 3940,5145 4111,5145 4155,5101 v1(4171,5101)
INSIDE_B9: ETH1_U_TOP_HEADER_WRP8.31 VT1_U_VT_WRP15.IVCC1 ZIF1.10 | length 3994
  Top Layer w7: ZIF1.10@2537.5,3237.5 2577,3277 2577,3694 2543,3728 2543,5006 2687.5,5150.5 2687.5,5206 ; v1(2663,5206) 2687.5,5206 ; ETH1_U_TOP_HEADER_WRP8.31@2687.5,5253.54 2687.5,5206 ; VT1_U_VT_WRP15.IVCC1@4133.86,5136.02 v1(4171,5136.02)
  Bottom Layer w7: v1(2663,5206) 2581,5288 2581,5312 2609,5340 3937.65,5340 4141.63,5136.02 v1(4171,5136.02)
INSIDE_B10: ETH1_U_TOP_HEADER_WRP8.30 VT1_U_VT_WRP15.IVCC2 ZIF1.11 | length 3594.7
  Top Layer w7: ZIF1.11@2637.5,3237.5 2598.47,3276.53 2598.47,3376.53 2645,3423.06 2645,5065 2787.5,5207.5 ETH1_U_TOP_HEADER_WRP8.30@2787.5,5253.54 2787.5,5302.5 v1(2788,5303) ; v1(4037,5161.61) VT1_U_VT_WRP15.IVCC2@4133.86,5161.61
  Bottom Layer w7: v1(2788,5303) 3831,5303 3919,5215 4035,5215 4035,5163.61 v1(4037,5161.61)
INSIDE_B11: ETH1_U_TOP_HEADER_WRP8.29 VT1_U_VT_WRP15.IVCC3 ZIF1.12 | length 4274.1
  Top Layer w7: ZIF1.12@2737.5,3237.5 2777,3277 2777,3401 2758,3420 2758,5060 2887.5,5189.5 v1(2887.5,5204) ETH1_U_TOP_HEADER_WRP8.29@2887.5,5253.54 ; VT1_U_VT_WRP15.IVCC3@4133.86,5187.2 4170.8,5187.2 v1(4171,5187)
  Bottom Layer w7: v1(2887.5,5204) 2856.5,5173 2608,5173 2568,5213 2568,5320 2603,5355 4003,5355 v1(4171,5187)
INSIDE_B12: ETH1_U_TOP_HEADER_WRP8.28 VT1_U_VT_WRP15.IVCC4 ZIF1.13 | length 3879.4
  Top Layer w7: ZIF1.13@2437.5,3137.5 2477,3177 2560,3177 2577,3160 2577,3129.47 2608,3098.47 2757.47,3098.47 2790,3131 2790,3398 2845,3453 2845,5068.5 2987.5,5211 ETH1_U_TOP_HEADER_WRP8.28@2987.5,5253.54 2987.5,5296 v1(3010.5,5319) ; v1(4096,5219) 4102.2,5212.8 VT1_U_VT_WRP15.IVCC4@4133.86,5212.8
  Mid-Layer 1 w7: v1(3010.5,5319) 3996,5319 v1(4096,5219)
INSIDE_B13: ETH1_U_TOP_HEADER_WRP8.27 VT1_U_VT_WRP15.IVCC5 ZIF1.14 | length 3950.5
  Top Layer w7: ZIF1.14@2537.5,3137.5 2589.53,3085.47 2851.47,3085.47 2898,3132 2898,3481 3037,3620 3037,5067 3087.5,5117.5 3087.5,5204.5 ; ETH1_U_TOP_HEADER_WRP8.27@3087.5,5253.54 3087.5,5204.5 ; v1(3151,5141) 3087.5,5204.5 ; VT1_U_VT_WRP15.IVCC5@4133.86,5238.39 v1(4171,5238.39)
  Bottom Layer w7: v1(3151,5141) 3216.5,5075.5 4029.5,5075.5 4035,5081 4176,5081 4186,5091 4186,5223.39 v1(4171,5238.39)
INSIDE_B14: ETH1_U_TOP_HEADER_WRP8.26 VT1_U_VT_WRP15.IVCC6 ZIF1.15 | length 3636
  Top Layer w7: ZIF1.15@2637.5,3137.5 2698,3198 2698,3377 2717,3396 2717,5062 2837,5182 2837,5288 2892,5343 3152,5343 3187.5,5302.5 ; ETH1_U_TOP_HEADER_WRP8.26@3187.5,5253.54 3187.5,5302.5 ; VT1_U_VT_WRP15.IVCC6@4133.86,5263.98 4096,5263.98 4057.48,5302.5 3187.5,5302.5
INSIDE_B15: ETH1_U_TOP_HEADER_WRP8.25 VT1_U_VT_WRP15.IVCC7 ZIF1.16 | length 3766.9
  Top Layer w7: v1(3287.5,5121) 3287.5,5212.5 ; ETH1_U_TOP_HEADER_WRP8.25@3287.5,5253.54 3287.5,5212.5 ; v1(3304,5196) 3287.5,5212.5 ; VT1_U_VT_WRP15.IVCC7@4133.86,5289.57 v1(4171,5289.57)
  Mid-Layer 2 w7: ZIF1.16@2737.5,3137.5 2777,3177 2777,4119 2773,4123 2773,4708 3186,5121 v1(3287.5,5121) ; v1(3304,5196) 3538,4962 4164,4962 4186,4984 4186,5274.57 v1(4171,5289.57)
INSIDE_B16: ETH1_U_TOP_HEADER_WRP7.40 VT1_U_VT_WRP14.IVCC0 ZIF1.17 | length 3187.8
  Top Layer w7: ETH1_U_TOP_HEADER_WRP7.40@1787.5,4253.54 1787.5,4302.5 v1(1788,4303) ; VT1_U_VT_WRP14.IVCC0@4133.86,3884.84 4169.84,3884.84 v1(4216.68,3838)
  Mid-Layer 1 w7: v1(1788,4303) 1872,4303 ZIF1.17@2837.5,3337.5
  Bottom Layer w7: ZIF1.17@2837.5,3337.5 3338,3838 v1(4216.68,3838)
INSIDE_B17: ETH1_U_TOP_HEADER_WRP7.39 VT1_U_VT_WRP14.IVCC1 ZIF1.18 | length 3273.6
  Top Layer w7: v1(1887.5,4204) ETH1_U_TOP_HEADER_WRP7.39@1887.5,4253.54 ; VT1_U_VT_WRP14.IVCC1@4133.86,3936.02 4170.98,3936.02 v1(4267.5,3839.5)
  Mid-Layer 1 w7: v1(1887.5,4204) 1927,4204 2690,3441 2690,3320 2712,3298 2898,3298 ZIF1.18@2937.5,3337.5
  Bottom Layer w7: ZIF1.18@2937.5,3337.5 3370,3770 4198,3770 v1(4267.5,3839.5)
INSIDE_B18: ETH1_U_TOP_HEADER_WRP7.38 VT1_U_VT_WRP14.IVCC2 ZIF1.19 | length 3449
  Top Layer w7: ETH1_U_TOP_HEADER_WRP7.38@1987.5,4253.54 1987.5,4302.5 v1(1988,4303) ; v1(4096,3961.61) VT1_U_VT_WRP14.IVCC2@4133.86,3961.61
  Mid-Layer 1 w7: v1(1988,4303) 1988,4221 2036,4173 2202,4173 ZIF1.19@3037.5,3337.5
  Bottom Layer w7: ZIF1.19@3037.5,3337.5 3370,3670 3773,3670 3857,3754 4260,3754 4344,3838 4344,3925 4307.39,3961.61 v1(4096,3961.61)
INSIDE_B19: ETH1_U_TOP_HEADER_WRP7.37 VT1_U_VT_WRP14.IVCC3 ZIF1.20 | length 3206.8
  Top Layer w7: v1(2087,4204) 2087.5,4204.5 ETH1_U_TOP_HEADER_WRP7.37@2087.5,4253.54 ; v1(4079.73,3987.2) VT1_U_VT_WRP14.IVCC3@4133.86,3987.2
  Mid-Layer 1 w7: v1(2087,4204) 2110,4227 2315,4227 3137.5,3404.5 ; ZIF1.20@3137.5,3337.5 3137.5,3404.5 ; v1(4079.73,3987.2) 3983.93,4083 3180.5,4083 3137.5,4040 3137.5,3404.5
INSIDE_B20: ETH1_U_TOP_HEADER_WRP7.36 VT1_U_VT_WRP14.IVCC4 ZIF1.21 | length 2729.9
  Top Layer w7: v1(2187.5,4189) ETH1_U_TOP_HEADER_WRP7.36@2187.5,4253.54 ; ZIF1.21@3237.5,3337.5 3912.8,4012.8 VT1_U_VT_WRP14.IVCC4@4133.86,4012.8
  Mid-Layer 1 w7: v1(2187.5,4189) 2321,4189 3088,3422 3088,3330 3120,3298 3198,3298 ZIF1.21@3237.5,3337.5
INSIDE_B21: ETH1_U_TOP_HEADER_WRP7.35 VT1_U_VT_WRP14.IVCC5 ZIF1.22 | length 3983.1
  Top Layer w7: ETH1_U_TOP_HEADER_WRP7.35@2287.5,4253.54 2287.5,4204.5 v1(2288,4204) ; ZIF1.22@3337.5,3337.5 3548,3548 4291,3548 4303,3560 4303,4033.39 4298,4038.39 VT1_U_VT_WRP14.IVCC5@4133.86,4038.39
  Mid-Layer 2 w7: v1(2288,4204) 2477,4015 2477,3133 2524.53,3085.47 3251.47,3085.47 3288,3122 3288,3288 ZIF1.22@3337.5,3337.5
INSIDE_B22: ETH1_U_TOP_HEADER_WRP7.34 VT1_U_VT_WRP14.IVCC6 ZIF1.23 | length 3319.8
  Top Layer w7: ETH1_U_TOP_HEADER_WRP7.34@2387.5,4253.54 2387.5,4302.5 v1(2388,4303) ; v1(3477,4063.98) VT1_U_VT_WRP14.IVCC6@4133.86,4063.98
  Mid-Layer 1 w7: ZIF1.23@2837.5,3237.5 2877,3277 3447,3277 3477,3307 v1(3477,4063.98)
  Bottom Layer w7: v1(2388,4303) 2456,4235 3305.98,4235 v1(3477,4063.98)
INSIDE_B23: ETH1_U_TOP_HEADER_WRP7.33 VT1_U_VT_WRP14.IVCC7 ZIF1.24 | length 3257.8
  Top Layer w7: v1(2487.5,4176) v1(2487.5,4190) ETH1_U_TOP_HEADER_WRP7.33@2487.5,4253.54 ; v1(4091.43,4089.57) VT1_U_VT_WRP14.IVCC7@4133.86,4089.57
  Mid-Layer 1 w7: v1(2487.5,4176) 2567.5,4096 4085,4096 v1(4091.43,4089.57)
  Mid-Layer 2 w7: v1(2487.5,4190) 2586,4091.5 2586,3220 2618,3188 2654,3188 2698,3144 2698,3120.47 2720,3098.47 2760.47,3098.47 2798,3136 2798,3160 2815,3177 2877,3177 ZIF1.24@2937.5,3237.5
INSIDE_B24: ETH1_U_TOP_HEADER_WRP7.32 VT1_U_VT_WRP13.IVCC0 ZIF1.25 | length 3127.6
  Top Layer w7: ETH1_U_TOP_HEADER_WRP7.32@2587.5,4253.54 2587.5,4302.5 v1(2588,4303) ; v1(4133,4247) 4170.84,4284.84 VT1_U_VT_WRP13.IVCC0@4133.86,4284.84
  Mid-Layer 1 w7: v1(2588,4303) 2644,4247 v1(4133,4247)
  Mid-Layer 2 w7: v1(2588,4303) 2672,4219 2672,4068 2682,4058 v1(2682,3307)
  Bottom Layer w7: v1(2682,3307) 2701,3288 2987,3288 ZIF1.25@3037.5,3237.5
INSIDE_B25: ETH1_U_TOP_HEADER_WRP7.31 VT1_U_VT_WRP13.IVCC1 ZIF1.26 | length 2703.6
  Top Layer w7: v1(2687.5,4204) ETH1_U_TOP_HEADER_WRP7.31@2687.5,4253.54 ; VT1_U_VT_WRP13.IVCC1@4133.86,4336.02 v1(4171,4336)
  Mid-Layer 1 w7: v1(2687.5,4204) 2703.5,4220 3104,4220 ; v1(3186,4138) 3104,4220 ; v1(4171,4336) 4171,4264 4127,4220 3104,4220
  Mid-Layer 2 w7: ZIF1.26@3137.5,3237.5 3186,3286 v1(3186,4138)
INSIDE_B26: ETH1_U_TOP_HEADER_WRP7.30 VT1_U_VT_WRP13.IVCC2 ZIF1.27 | length 2849.4
  Top Layer w7: v1(2787.5,4129) ETH1_U_TOP_HEADER_WRP7.30@2787.5,4253.54 v1(2787.5,4331) ; v1(4096,4362) 4096.39,4361.61 VT1_U_VT_WRP13.IVCC2@4133.86,4361.61
  Mid-Layer 1 w7: v1(2787.5,4331) 2891,4331 2946,4386 3460,4386 3484,4362 v1(4096,4362)
  Mid-Layer 2 w7: v1(2787.5,4129) 2998,3918.5 2998,3208 3008,3198 3198,3198 ZIF1.27@3237.5,3237.5
INSIDE_B27: ETH1_U_TOP_HEADER_WRP7.29 VT1_U_VT_WRP13.IVCC3 ZIF1.28 | length 2979.4
  Top Layer w7: v1(2887.5,4204.17) ETH1_U_TOP_HEADER_WRP7.29@2887.5,4253.54 ; VT1_U_VT_WRP13.IVCC3@4133.86,4387.2 4164.8,4387.2 v1(4171,4381)
  Mid-Layer 1 w7: v1(2887.5,4204.17) 2902.67,4189 3104,4189 3169.5,4123.5 4101.5,4123.5 4186,4208 4186,4366 v1(4171,4381)
  Mid-Layer 2 w7: v1(2887.5,4204.17) 2921.67,4170 3192,4170 3377,3985 3377,3277 ZIF1.28@3337.5,3237.5
INSIDE_B28: ETH1_U_TOP_HEADER_WRP7.28 VT1_U_VT_WRP13.IVCC4 ZIF1.29 | length 2680.4
  Top Layer w7: ZIF1.29@2837.5,3137.5 2877,3177 2877,3526 3017,3666 3017,4069 2987.5,4098.5 ETH1_U_TOP_HEADER_WRP7.28@2987.5,4253.54 v1(2987.5,4304) ; v1(4082.2,4412.8) VT1_U_VT_WRP13.IVCC4@4133.86,4412.8
  Bottom Layer w7: v1(2987.5,4304) 3216,4304 3258,4346 3258,4491 3280,4513 3408,4513 3451,4470 3451,4402 3472,4381 3734,4381 3768,4415 4080,4415 v1(4082.2,4412.8)
INSIDE_B29: ETH1_U_TOP_HEADER_WRP7.27 VT1_U_VT_WRP13.IVCC5 ZIF1.30 | length 2751.4
  Top Layer w7: ZIF1.30@2937.5,3137.5 2987,3187 2987,3534 3058,3605 3058,4174.67 3087.5,4204.17 ETH1_U_TOP_HEADER_WRP7.27@3087.5,4222 ; v1(3072,4204) 3072,4206.5 ETH1_U_TOP_HEADER_WRP7.27@3087.5,4222 ; ETH1_U_TOP_HEADER_WRP7.27@3087.5,4253.54 ETH1_U_TOP_HEADER_WRP7.27@3087.5,4222 ; VT1_U_VT_WRP13.IVCC5@4133.86,4438.39 4170.61,4438.39 v1(4171,4438)
  Mid-Layer 2 w7: v1(3072,4204) 3072,4554.85 3088,4570.85 3141.15,4570.85 3274,4438 v1(4171,4438)
INSIDE_B30: ETH1_U_TOP_HEADER_WRP7.26 VT1_U_VT_WRP13.IVCC6 ZIF1.31 | length 2490.6
  Top Layer w7: ZIF1.31@3037.5,3137.5 3087,3187 3087,3475 3217,3605 3217,4170.5 3187.5,4200 ETH1_U_TOP_HEADER_WRP7.26@3187.5,4253.54 v1(3187.5,4346.5) ; v1(4080,4464) VT1_U_VT_WRP13.IVCC6@4133.86,4463.98
  Bottom Layer w7: v1(3187.5,4346.5) 3223,4382 3223,4488 3261,4526 3484,4526 3549,4461 3549,4408 3560,4397 3717,4397 3784,4464 v1(4080,4464)
INSIDE_B31: ETH1_U_TOP_HEADER_WRP7.25 VT1_U_VT_WRP13.IVCC7 ZIF1.32 | length 2276.9
  Top Layer w7: ZIF1.32@3137.5,3137.5 3187,3187 3187,3412 3258,3483 3258,4160 3287.5,4189.5 v1@3287.5,4204.5 ; ETH1_U_TOP_HEADER_WRP7.25@3287.5,4253.54 v1@3287.5,4204.5 ; v1(3288,4204) v1@3287.5,4204.5 ; VT1_U_VT_WRP13.IVCC7@4133.86,4489.57 v1(4171,4489.57)
  Mid-Layer 2 w7: v1(3288,4204) 3966,4204 4186,4424 4186,4474.57 v1(4171,4489.57)
INSIDE_B32: ETH1_U_TOP_HEADER_WRP6.40 VT1_U_VT_WRP12.IVCC0 ZIF1.33 | length 3323.8
  Top Layer w7: ETH1_U_TOP_HEADER_WRP6.40@1221.46,1787.5 v1(1271,1787.5) ; VT1_U_VT_WRP12.IVCC0@1590.16,4108.86 1590.16,3821.84 1789,3623 1789,2717 2108,2398 2177,2398 ZIF1.33@2237.5,2337.5
  Bottom Layer w7: v1(1271,1787.5) 1779.5,2296 2196,2296 ZIF1.33@2237.5,2337.5
INSIDE_B33: ETH1_U_TOP_HEADER_WRP6.39 VT1_U_VT_WRP12.IVCC1 ZIF1.34 | length 3400.2
  Top Layer w7: ETH1_U_TOP_HEADER_WRP6.39@1221.46,1887.5 v1(1345,1887.5) ; VT1_U_VT_WRP12.IVCC1@1538.98,4108.86 1538.98,4146 1553.98,4161 1648,4161 1853,3956 1853,3222 2098,2977 2160,2977 2198,2939 2198,2477 ZIF1.34@2237.5,2437.5
  Bottom Layer w7: v1(1345,1887.5) 1853.5,2396 2196,2396 ZIF1.34@2237.5,2437.5
INSIDE_B34: ETH1_U_TOP_HEADER_WRP6.38 VT1_U_VT_WRP12.IVCC2 ZIF1.35 | length 3497.3
  Top Layer w7: ETH1_U_TOP_HEADER_WRP6.38@1221.46,1987.5 v1(1271,1987.5) v1(1325,1987.5) ; v1(1513.39,3887) VT1_U_VT_WRP12.IVCC2@1513.39,4108.86
  Mid-Layer 2 w7: v1(1325,1987.5) 1325,3698.61 v1(1513.39,3887)
  Bottom Layer w7: v1(1271,1987.5) 1768.97,2485.47 2185.47,2485.47 ZIF1.35@2237.5,2537.5
INSIDE_B35: ETH1_U_TOP_HEADER_WRP6.37 VT1_U_VT_WRP12.IVCC3 ZIF1.36 | length 4752.1
  Top Layer w7: ETH1_U_TOP_HEADER_WRP6.37@1221.46,2087.5 1411.5,2087.5 1444,2120 1444,2295 1488,2339 1556,2339 1593,2376 1593,3721 ; VT1_U_VT_WRP12.IVCC3@1487.8,4108.86 1487.8,3826.2 1593,3721 ; ZIF1.36@2237.5,2637.5 2277,2598 2277,2309 2256,2288 1744,2288 1712,2320 1712,3602 1593,3721
INSIDE_B36: ETH1_U_TOP_HEADER_WRP6.36 VT1_U_VT_WRP12.IVCC4 ZIF1.37 | length 3218.6
  Top Layer w7: ETH1_U_TOP_HEADER_WRP6.36@1221.46,2187.5 v1(1270.83,2187.5) ; v1(1462.2,3894.94) VT1_U_VT_WRP12.IVCC4@1462.2,4108.86
  Mid-Layer 1 w7: v1(1270.83,2187.5) 2255.5,2187.5 2294.77,2226.77 2294.77,2282.39 2316.59,2304.2 2316.59,2316.59 ZIF1.37@2337.5,2337.5
  Mid-Layer 2 w7: v1(1270.83,2187.5) 1286,2202.67 1286,3718.74 v1(1462.2,3894.94)
INSIDE_B37: ETH1_U_TOP_HEADER_WRP6.35 VT1_U_VT_WRP12.IVCC5 ZIF1.38 | length 3251.8
  Top Layer w7: ETH1_U_TOP_HEADER_WRP6.35@1221.46,2287.5 v1(1304,2287.5) ; VT1_U_VT_WRP12.IVCC5@1436.61,4108.86 v1(1436.61,4161)
  Mid-Layer 1 w7: v1(1304,2287.5) 1306.03,2289.53 2257.53,2289.53 2285.47,2317.47 2285.47,2385.47 ZIF1.38@2337.5,2437.5
  Mid-Layer 2 w7: v1(1304,2287.5) 1304,3710 1478,3884 1478,4152 1469,4161 v1(1436.61,4161)
INSIDE_B38: ETH1_U_TOP_HEADER_WRP6.34 VT1_U_VT_WRP12.IVCC6 ZIF1.39 | length 3183.3
  Top Layer w7: v1(1157,2387.5) ETH1_U_TOP_HEADER_WRP6.34@1221.46,2387.5 v1(1270.83,2387.5) ; VT1_U_VT_WRP12.IVCC6@1411.02,4108.86 v1(1411,4146)
  Mid-Layer 1 w7: v1(1270.83,2387.5) 2255.5,2387.5 2288,2420 2288,2488 ZIF1.39@2337.5,2537.5
  Mid-Layer 2 w7: v1(1157,2387.5) 1157,2620 1190,2653 1190,3925 v1(1411,4146)
INSIDE_B39: ETH1_U_TOP_HEADER_WRP6.33 VT1_U_VT_WRP12.IVCC7 ZIF1.40 | length 2986.6
  Top Layer w7: v1(1172.09,2487.5) ETH1_U_TOP_HEADER_WRP6.33@1221.46,2487.5 ; v1(1385,4071) 1385.43,4071.43 VT1_U_VT_WRP12.IVCC7@1385.43,4108.86
  Mid-Layer 1 w7: v1(1172.09,2487.5) 1808.5,2487.5 1919.47,2598.47 2298.47,2598.47 ZIF1.40@2337.5,2637.5
  Mid-Layer 2 w7: v1(1172.09,2487.5) 1222,2537.41 1222,3683 1300,3761 1300,3986 v1(1385,4071)
INSIDE_B40: ETH1_U_TOP_HEADER_WRP6.32 VT1_U_VT_WRP11.IVCC0 ZIF1.41 | length 3004.9
  Top Layer w7: VT1_U_VT_WRP11.IVCC0@1190.16,4108.86 1190.16,3891.16 1136,3837 1136,2619.5 1168,2587.5 ETH1_U_TOP_HEADER_WRP6.32@1221.46,2587.5 1270.5,2587.5 v1(1271,2588)
  Bottom Layer w7: v1(1271,2588) 2247,2588 2283,2552 2283,2425 2320,2388 2387,2388 ZIF1.41@2437.5,2337.5
INSIDE_B41: ETH1_U_TOP_HEADER_WRP6.31 VT1_U_VT_WRP11.IVCC1 ZIF1.42 | length 3389.3
  Top Layer w7: VT1_U_VT_WRP11.IVCC1@1138.98,4108.86 1138.98,4065.02 1146,4058 1146,3873 1123,3850 1123,2600 1166,2557 1264,2557 1286,2579 1286,2665.5 1264,2687.5 ETH1_U_TOP_HEADER_WRP6.31@1221.46,2687.5 v1(1172.09,2687.5)
  Mid-Layer 1 w7: v1(1172.09,2687.5) 1174.11,2685.47 2359.53,2685.47 2388,2657 2388,2487 ZIF1.42@2437.5,2437.5
INSIDE_B42: ETH1_U_TOP_HEADER_WRP6.30 VT1_U_VT_WRP11.IVCC2 ZIF1.43 | length 3497.9
  Top Layer w7: VT1_U_VT_WRP11.IVCC2@1113.39,4108.86 1113.39,4068 1098,4052.61 1098,2598 1154,2542 1280,2542 1299,2561 1299,2752.5 v1(1271,2787.5) ETH1_U_TOP_HEADER_WRP6.30@1221.46,2787.5
  Bottom Layer w7: v1(1271,2787.5) 1287.5,2771 1946.47,2771 1952,2776.53 2459.47,2776.53 2480,2756 2480,2580 ZIF1.43@2437.5,2537.5
INSIDE_B43: ETH1_U_TOP_HEADER_WRP6.29 VT1_U_VT_WRP11.IVCC3 ZIF1.44 | length 3700.5
  Top Layer w7: VT1_U_VT_WRP11.IVCC3@1087.8,4108.86 1087.8,4071 1077.01,4060.22 1077.01,4027.5 1063,4013.49 1063,2563 1104,2522 1296,2522 1312,2538 1312,2839.5 1264,2887.5 ETH1_U_TOP_HEADER_WRP6.29@1221.46,2887.5 1180.5,2887.5 v1(1172,2922)
  Mid-Layer 1 w7: v1(1172,2922) v1(1888,2922)
  Mid-Layer 2 w7: v1(1888,2922) 2112,2698 2377,2698 ZIF1.44@2437.5,2637.5
INSIDE_B44: ETH1_U_TOP_HEADER_WRP6.28 VT1_U_VT_WRP11.IVCC4 ZIF1.45 | length 4329
  Top Layer w7: VT1_U_VT_WRP11.IVCC4@1062.2,4108.86 1062.2,4040.5 1050,4028.3 1050,2552 1146,2456 1277,2456 1325,2504 1325,2930.5 v1@1270.5,2987.5 ; ETH1_U_TOP_HEADER_WRP6.28@1221.46,2987.5 v1@1270.5,2987.5 ; v1(1271,2988) v1@1270.5,2987.5 ; v1(2104,2997) 2448,2997 2498,2947 2498,2377 ZIF1.45@2537.5,2337.5
  Mid-Layer 1 w7: v1(1271,2988) 1596,2988 1605,2997 v1(2104,2997)
INSIDE_B45: ETH1_U_TOP_HEADER_WRP6.27 VT1_U_VT_WRP11.IVCC5 ZIF1.46 | length 3664.6
  Top Layer w7: VT1_U_VT_WRP11.IVCC5@1036.61,4108.86 1036.61,4055.39 v1(1037,4055) ; v1(1172,3087.5) ETH1_U_TOP_HEADER_WRP6.27@1221.46,3087.5
  Mid-Layer 2 w7: v1(1037,4055) 1037,3222.5 v1(1172,3087.5)
  Bottom Layer w7: v1(1172,3087.5) 1172,3146 1189.5,3163.5 1903.5,3163.5 2089,2978 2467,2978 2478,2967 2478,2920 2511,2887 2752,2887 2777,2862 2777,2407 2768,2398 2577,2398 ZIF1.46@2537.5,2437.5
INSIDE_B46: ETH1_U_TOP_HEADER_WRP6.26 VT1_U_VT_WRP11.IVCC6 ZIF1.47 | length 3274.2
  Top Layer w7: v1(1011.02,3985) VT1_U_VT_WRP11.IVCC6@1011.02,4108.86 ; ETH1_U_TOP_HEADER_WRP6.26@1221.46,3187.5 ETH1_U_TOP_HEADER_WRP6.26@1241,3187.5 ; v1(1241,3136) ETH1_U_TOP_HEADER_WRP6.26@1241,3187.5 ; v1(1271,3187.5) ETH1_U_TOP_HEADER_WRP6.26@1241,3187.5
  Mid-Layer 1 w7: v1(970,3188) 1270.5,3188 v1(1271,3187.5)
  Mid-Layer 2 w7: v1(970,3188) 970,3943.98 v1(1011.02,3985)
  Bottom Layer w7: v1(1241,3136) 1743,3136 2089.47,2789.53 2480,2789.53 2498,2771.53 2498,2600 2521,2577 2662,2577 2685.47,2553.53 2685.47,2505.53 2720,2471 2737.5,2471 ZIF1.47@2737.5,2437.5
INSIDE_B47: ETH1_U_TOP_HEADER_WRP6.25 VT1_U_VT_WRP11.IVCC7 ZIF1.48 | length 3422.5
  Top Layer w7: VT1_U_VT_WRP11.IVCC7@985.43,4108.86 v1(985.43,4146.21) ; v1(1172,3288) 1172.5,3287.5 ETH1_U_TOP_HEADER_WRP6.25@1221.46,3287.5
  Mid-Layer 2 w7: v1(985.43,4146.21) 1053,4078.64 1053,3367 1132,3288 v1(1172,3288) ; v1(2636,2997) 2677,2956 2677,2477 ZIF1.48@2637.5,2437.5
  Bottom Layer w7: v1(1172,3288) 1253,3207 2011,3207 2081,3277 2377,3277 2398,3256 2398,3015 2416,2997 v1(2636,2997)
INSIDE_B48: ETH1_U_TOP_HEADER_WRP5.40 VT1_U_VT_WRP10.IVCC0 ZIF1.49 | length 5473.4
  Top Layer w7: ETH1_U_TOP_HEADER_WRP5.40@221.46,1787.5 313.5,1787.5 445.5,1919.5 445.5,2936 462.5,2953 656,2953 719,3016 719,3604 815,3700 815,4032.16 790.16,4057 v1(790.16,4071.3) VT1_U_VT_WRP10.IVCC0@790.16,4108.86
  Mid-Layer 1 w7: v1(790.16,4071.3) 785,4066.14 785,3880 832,3833 2272,3833 2598.47,3506.53 2598.47,3107.53 2608,3098 2677,3098 ZIF1.49@2737.5,3037.5
INSIDE_B49: ETH1_U_TOP_HEADER_WRP5.39 VT1_U_VT_WRP10.IVCC1 ZIF1.50 | length 5693.8
  Top Layer w7: ETH1_U_TOP_HEADER_WRP5.39@221.46,1887.5 172,1887.5 172,1752 189,1735 328,1735 464,1871 464,2307 496,2339 560,2339 578,2357 578,2473 721,2616 721,2963 743.33,2985.33 743.33,3581.33 828,3666 828,4120 802,4146 738.98,4146 VT1_U_VT_WRP10.IVCC1@738.98,4108.86 v1(738.98,4071.3)
  Bottom Layer w7: v1(738.98,4071.3) 787.17,4023.11 813.11,4023.11 813.11,3997.17 946.58,3863.69 962.28,3863.69 977.97,3848 2168,3848 2588,3428 2588,3087 ZIF1.50@2637.5,3037.5
INSIDE_B50: ETH1_U_TOP_HEADER_WRP5.38 VT1_U_VT_WRP10.IVCC2 ZIF1.51 | length 4553.6
  Top Layer w7: ETH1_U_TOP_HEADER_WRP5.38@221.46,1987.5 270.5,1987.5 v1(271,1988) ; VT1_U_VT_WRP10.IVCC2@713.39,4108.86 713.39,4142.39 752,4181 796,4181 841,4136 841,3649 756.33,3564.33 v1(756.33,2340)
  Bottom Layer w7: v1(271,1988) 623,2340 v1(756.33,2340) 887,2340 964,2417 1074,2417 1269,2612 2033,2612 2098,2677 2377,2677 ZIF1.51@2437.5,2737.5
INSIDE_B51: ETH1_U_TOP_HEADER_WRP5.37 VT1_U_VT_WRP10.IVCC3 ZIF1.52 | length 5769.6
  Top Layer w7: v1(202,2124) 202,2087.5 ETH1_U_TOP_HEADER_WRP5.37@221.46,2087.5 ; v1(687.8,4071) VT1_U_VT_WRP10.IVCC3@687.8,4108.86
  Bottom Layer w7: v1(202,2124) 202,2691 ; v1(687.8,4071) 748.8,4010 800,4010 800,3971 996,3775 1213,3775 1225,3763 1225,3367 1111,3253 600,3253 528,3181 528,3037 ; ZIF1.52@2437.5,2837.5 2388,2887 2025,2887 1761.5,3150.5 1227,3150.5 1207,3130.5 1207,3076 1168,3037 528,3037 ; 202,2691 202,2757 482,3037 528,3037 ; 202,2691 528,3017 528,3037
INSIDE_B52: ETH1_U_TOP_HEADER_WRP5.36 VT1_U_VT_WRP10.IVCC4 ZIF1.53 | length 5012.6
  Top Layer w7: ETH1_U_TOP_HEADER_WRP5.36@221.46,2187.5 v1(431,2187.5) ; VT1_U_VT_WRP10.IVCC4@662.2,4108.86 v1(662.2,4146)
  Mid-Layer 1 w7: v1(431,2187.5) 481.5,2238 2059.47,2238 2098,2276.53 2263.53,2276.53 2298.47,2311.47 2298.47,2360 2336.47,2398 2467,2398 2477,2408 2477,2898 ZIF1.53@2437.5,2937.5
  Mid-Layer 2 w7: v1(431,2187.5) 444.5,2201 444.5,3767.5 662.2,3985.2 v1(662.2,4146)
INSIDE_B53: ETH1_U_TOP_HEADER_WRP5.35 VT1_U_VT_WRP10.IVCC5 ZIF1.54 | length 5661.4
  Top Layer w7: v1(172.5,2287.5) ETH1_U_TOP_HEADER_WRP5.35@221.46,2287.5 ; v1(636.61,3660.39) VT1_U_VT_WRP10.IVCC5@636.61,4108.86
  Mid-Layer 1 w7: v1(172.5,2287.5) 157,2303 157,3302 284,3429 1731,3429 1756,3404 1985,3404 ; v1(636.61,3660.39) 784,3513 1876,3513 1985,3404 ; ZIF1.54@2437.5,3037.5 2477,3077 2477,3272 2451,3298 2091,3298 1985,3404
INSIDE_B54: ETH1_U_TOP_HEADER_WRP5.34 VT1_U_VT_WRP10.IVCC6 ZIF1.55 | length 4756.2
  Top Layer w7: ETH1_U_TOP_HEADER_WRP5.34@221.46,2387.5 v1(270.83,2387.5) v1(271,2387.5) ; VT1_U_VT_WRP10.IVCC6@611.02,4108.86 611.02,4154.02 656,4199 816,4199 854,4161 854,3531 825,3502 v1(825,2815)
  Mid-Layer 1 w7: v1(270.83,2387.5) 640.33,2757 767,2757 ; v1(271,2387.5) 543.5,2660 670,2660 767,2757 ; v1(825,2815) 767,2757 ; ZIF1.55@2337.5,2737.5 2298.47,2698.47 2206.06,2698.47 2176.53,2728 2176.53,2760 2160,2776.53 2118,2776.53 2098.47,2757 767,2757
INSIDE_B55: ETH1_U_TOP_HEADER_WRP5.33 VT1_U_VT_WRP10.IVCC7 ZIF1.56 | length 4945.2
  Top Layer w7: v1(172,2488) 172.5,2487.5 ETH1_U_TOP_HEADER_WRP5.33@221.46,2487.5 ; 585.14,4071 585.43,4071.3 VT1_U_VT_WRP10.IVCC7@585.43,4108.86
  Mid-Layer 1 w7: v1(326,4028) 369,4071 585.14,4071 620.14,4106 737,4106 771,4072 771,3869 1009,3631 2236,3631 2490,3377 2490,3032 2448,2990 2429,2990 2377,2938 2377,2877 ZIF1.56@2337.5,2837.5
  Mid-Layer 2 w7: v1(172,2488) 144.5,2515.5 144.5,3846.5 v1(326,4028)
INSIDE_B56: ETH1_U_TOP_HEADER_WRP5.32 VT1_U_VT_WRP9.IVCC0 ZIF1.57 | length 3944.2
  Top Layer w7: ETH1_U_TOP_HEADER_WRP5.32@221.46,2587.5 v1(286,2587.5) v1(322.5,2587.5) ; VT1_U_VT_WRP9.IVCC0@390.16,4108.86 390.16,4056.84 v1(391,4056)
  Mid-Layer 2 w7: v1(286,2587.5) 256,2617.5 256,3442 381,3567 381,4046 v1(391,4056) ; v1(2288,2729) 2288,2888 ZIF1.57@2337.5,2937.5
  Bottom Layer w7: v1(322.5,2587.5) 371,2636 1509,2636 1570,2697 2256,2697 v1(2288,2729)
INSIDE_B57: ETH1_U_TOP_HEADER_WRP5.31 VT1_U_VT_WRP9.IVCC1 ZIF1.58 | length 4508.8
  Top Layer w7: v1(172,2704) 172,2688 ; VT1_U_VT_WRP9.IVCC1@338.98,4108.86 338.98,4071.02 v1(341,4069) ; 172,2688 ETH1_U_TOP_HEADER_WRP5.31@221.46,2687.5 172.5,2687.5 172,2688
  Mid-Layer 1 w7: v1(172,2704) 238,2770 238,3034 334,3130 1200,3130 1234,3096 2157,3096 2198,3055 2198,3016 2216,2998 2258.53,2998 2276.53,3016 2276.53,3160 2293.53,3177 2360,3177 2377,3160 2377,3077 ZIF1.58@2337.5,3037.5
  Mid-Layer 2 w7: v1(172,2704) 230,2762 230,3638 341,3749 v1(341,4069)
INSIDE_B58: ETH1_U_TOP_HEADER_WRP5.30 VT1_U_VT_WRP9.IVCC2 ZIF1.59 | length 3981.6
  Top Layer w7: v1(270.83,2787.5) ETH1_U_TOP_HEADER_WRP5.30@221.46,2787.5 176,2787.5 144,2819.5 144,3880.61 313.39,4050 VT1_U_VT_WRP9.IVCC2@313.39,4108.86
  Mid-Layer 1 w7: v1(270.83,2787.5) 353.33,2870 1484,2870 1512.47,2898.47 2169,2898.47 2198.47,2869 2198.47,2807.53 2208,2798 2256,2798 2289.53,2831.53 2289.53,3089.53 ZIF1.59@2337.5,3137.5